# Altium PCB ESP32-PCB-Antenna-USB-Dongle-Motion-Sensor.PcbDoc
Units mm, origin at the board's own origin, x right, y up, seen from the top; angles counter-clockwise.
Board outline 32.5 x 46.2 mm, 4 copper layers (Top Layer, Mid Layer 1, Mid Layer 2, Bottom Layer), stack 1.57 mm thick; 54 components, 44 nets, 207 pads, 79 vias.
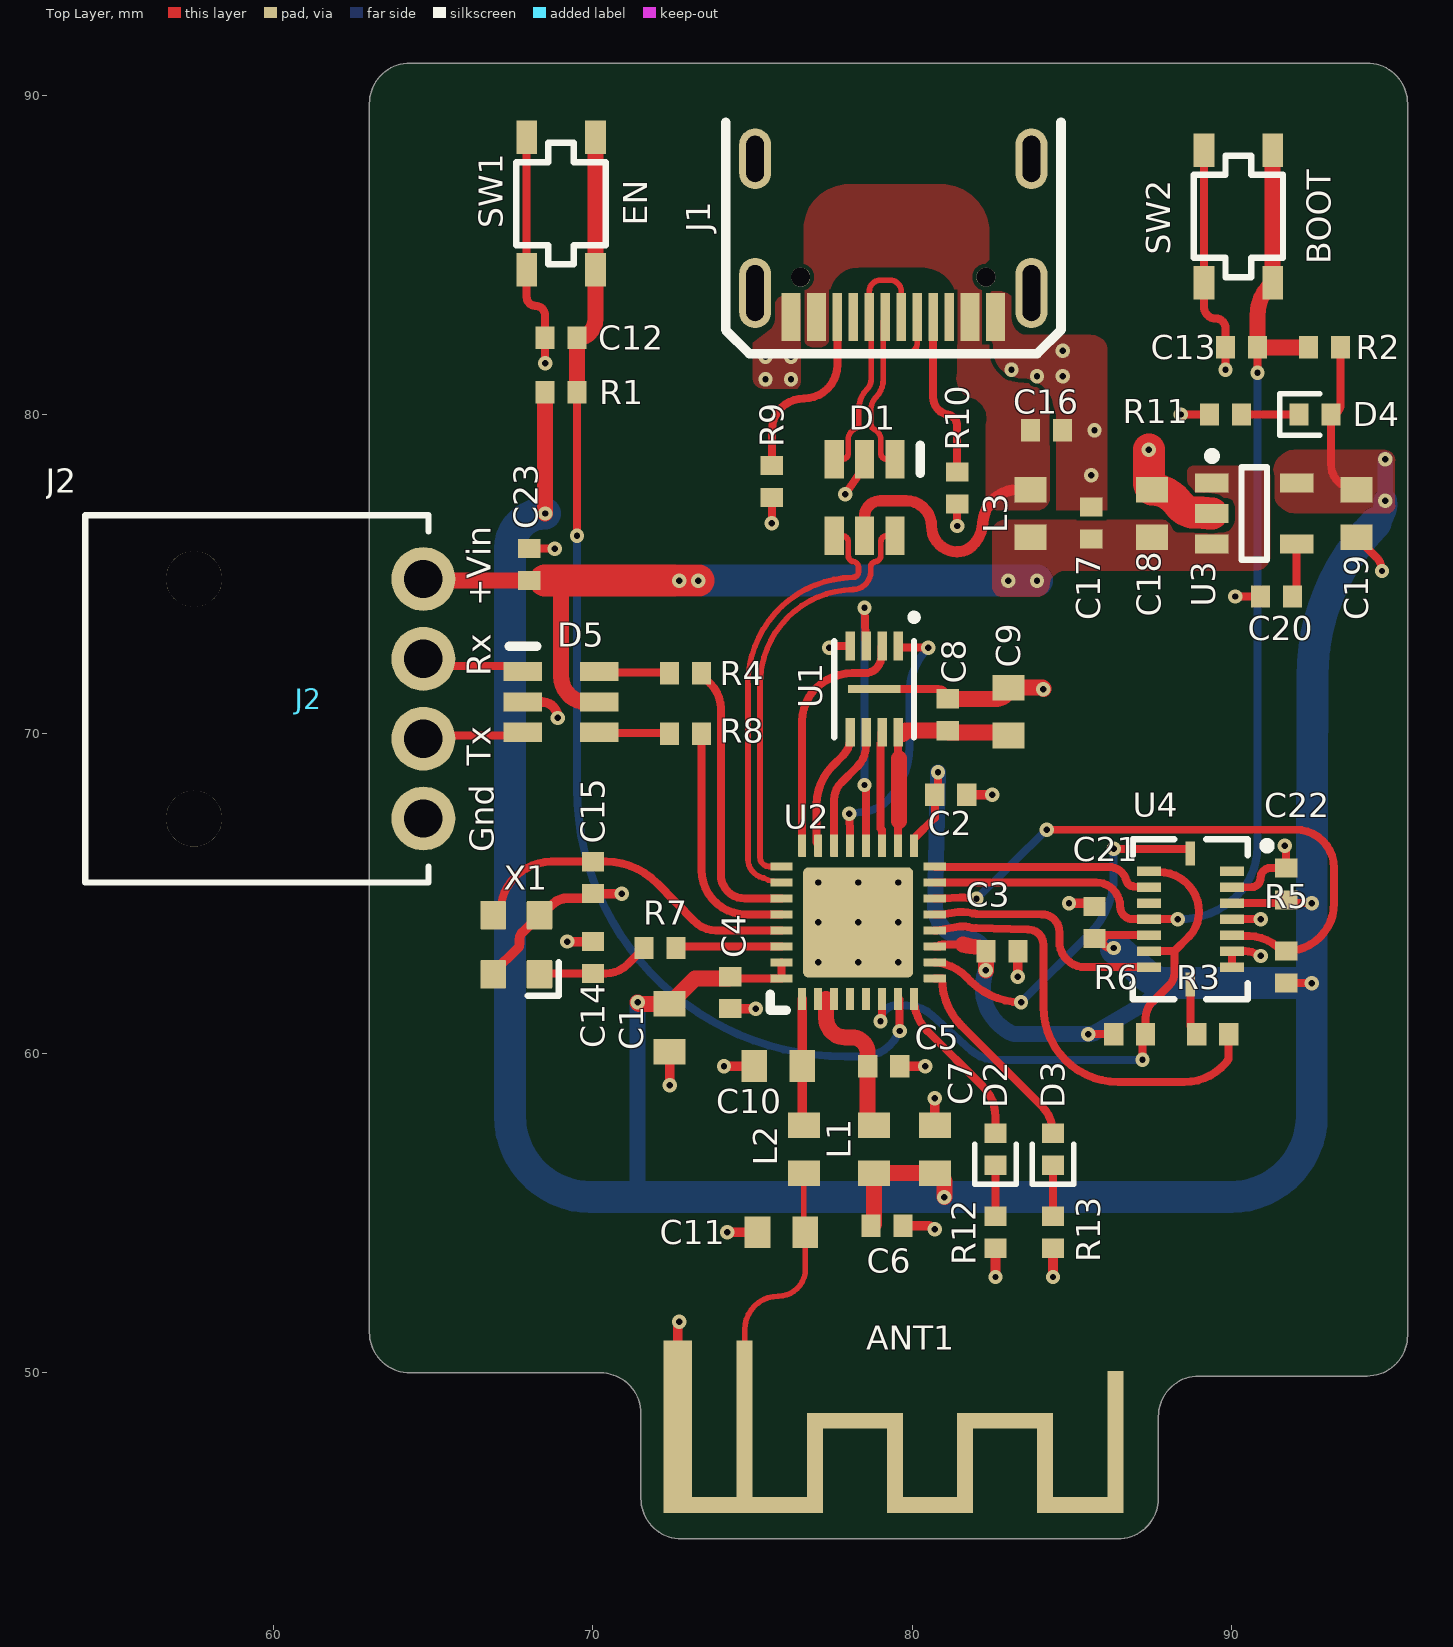
[diagram p0: Top Layer view]
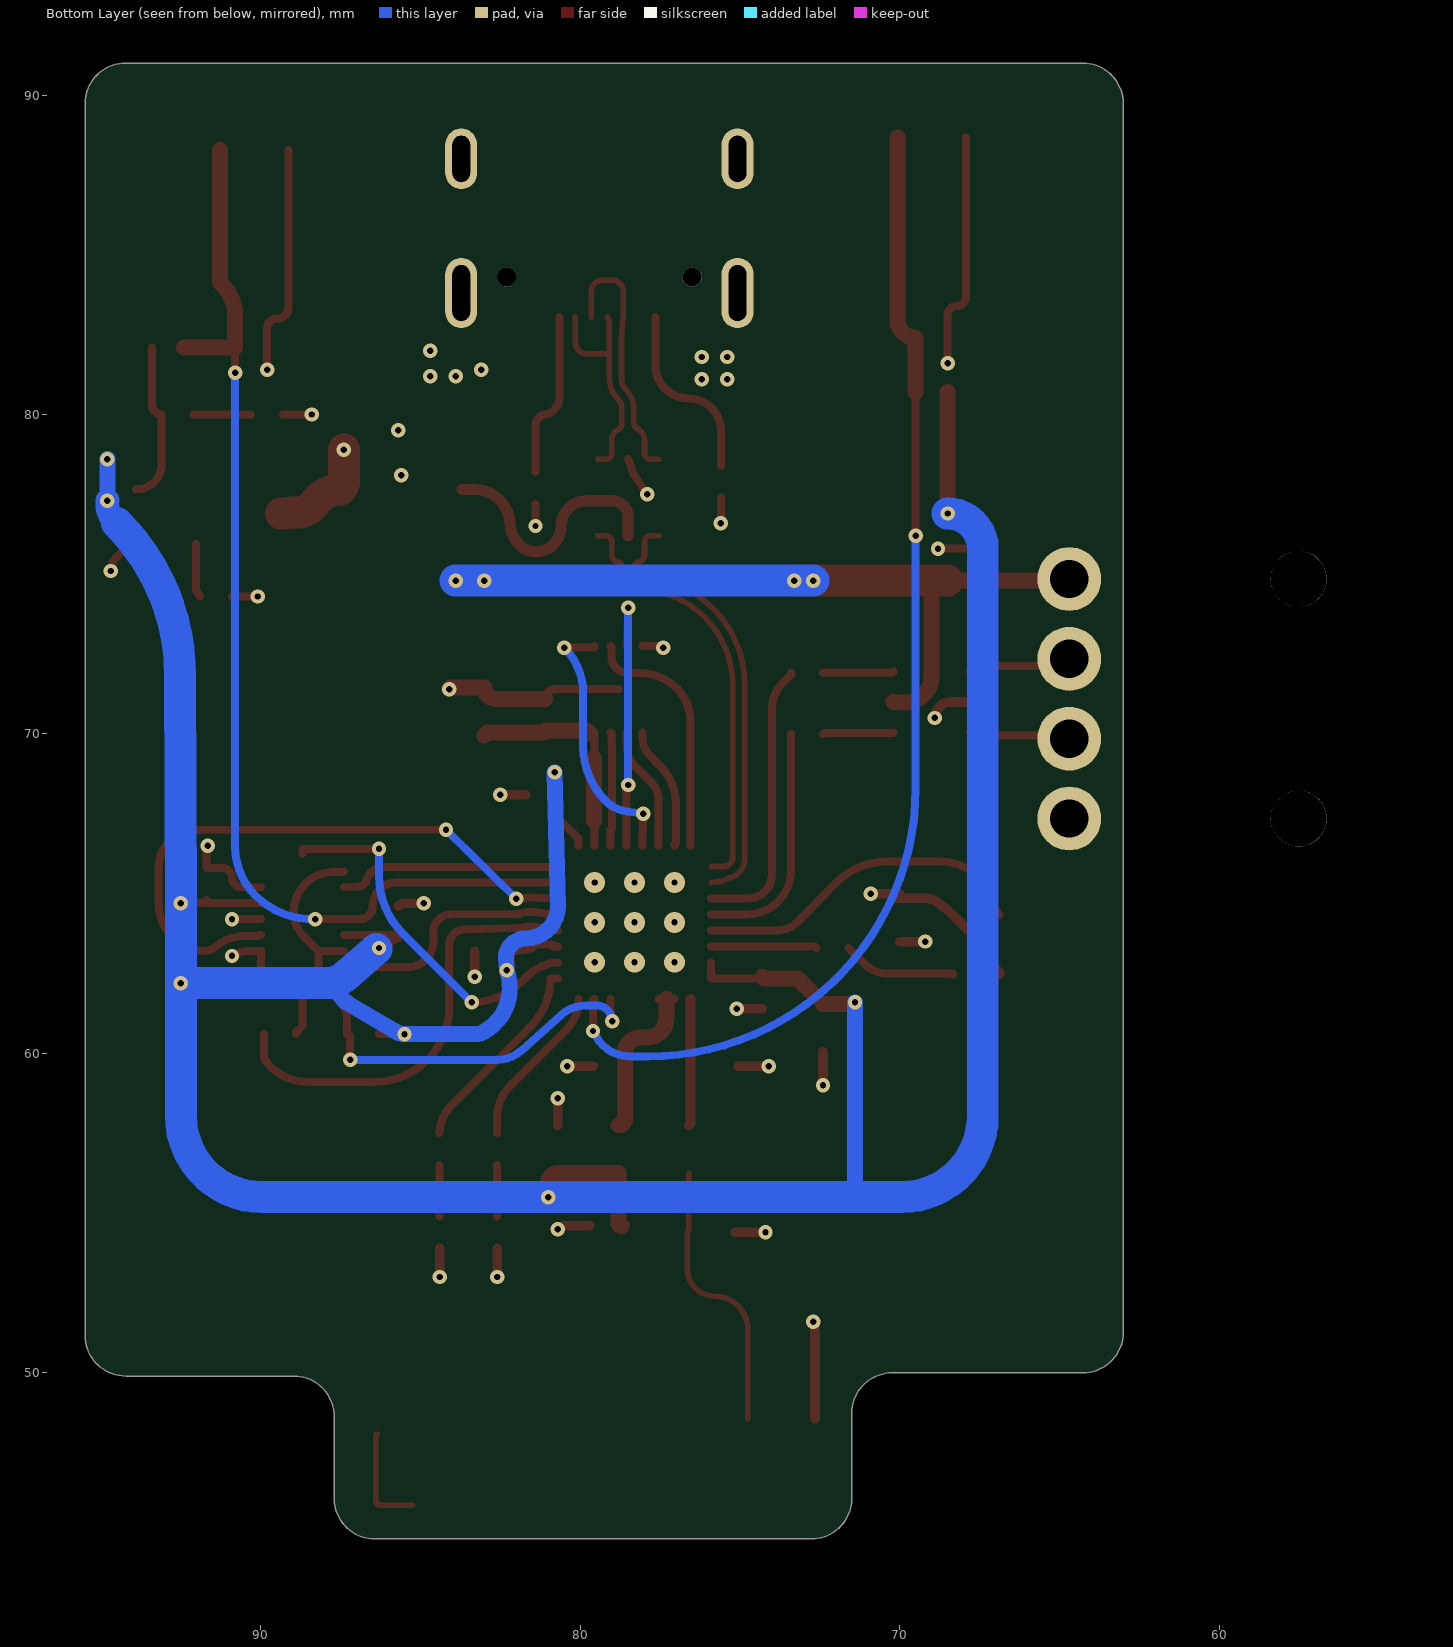
[diagram p1: Bottom Layer view, seen from below]
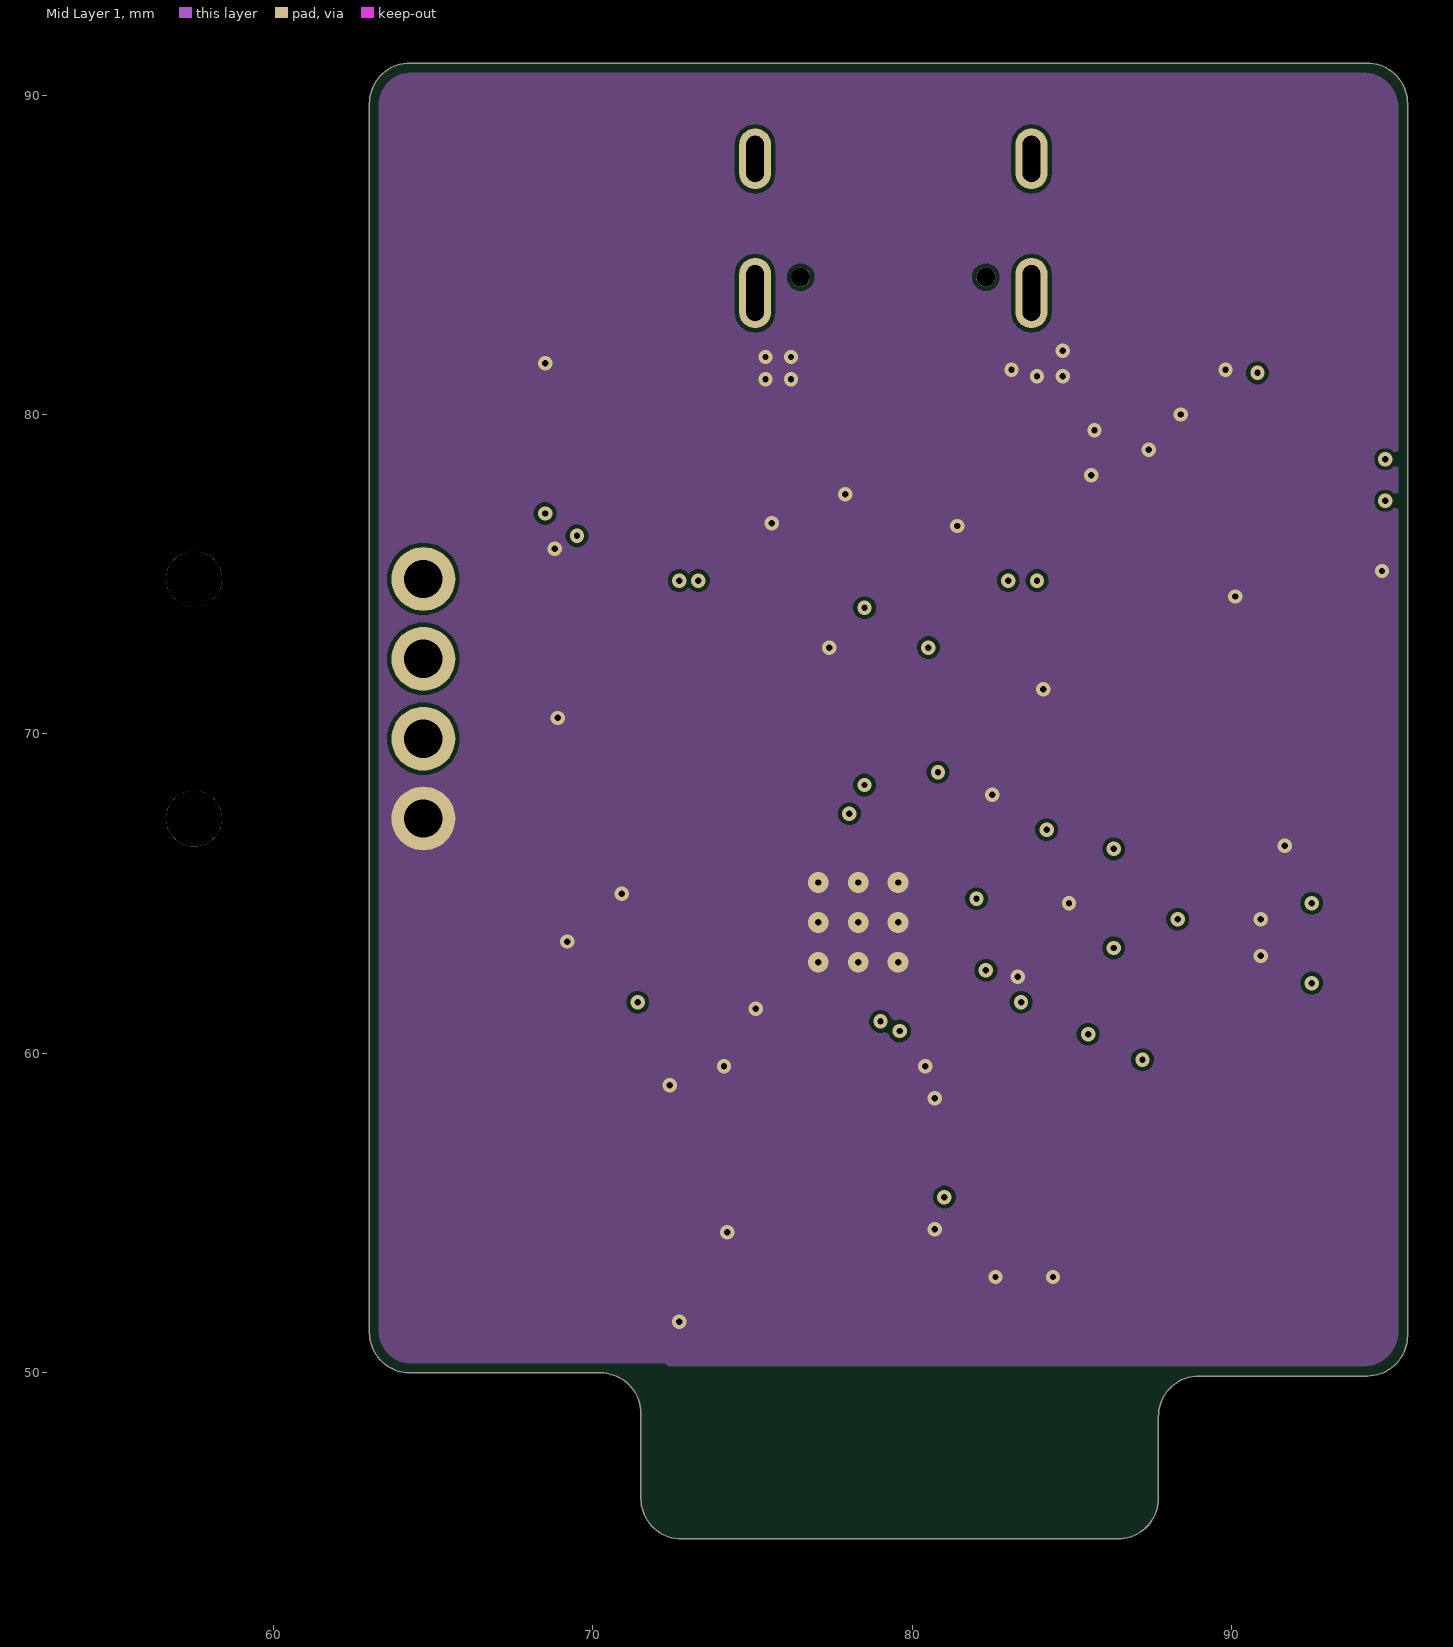
[diagram p2: Mid Layer 1]
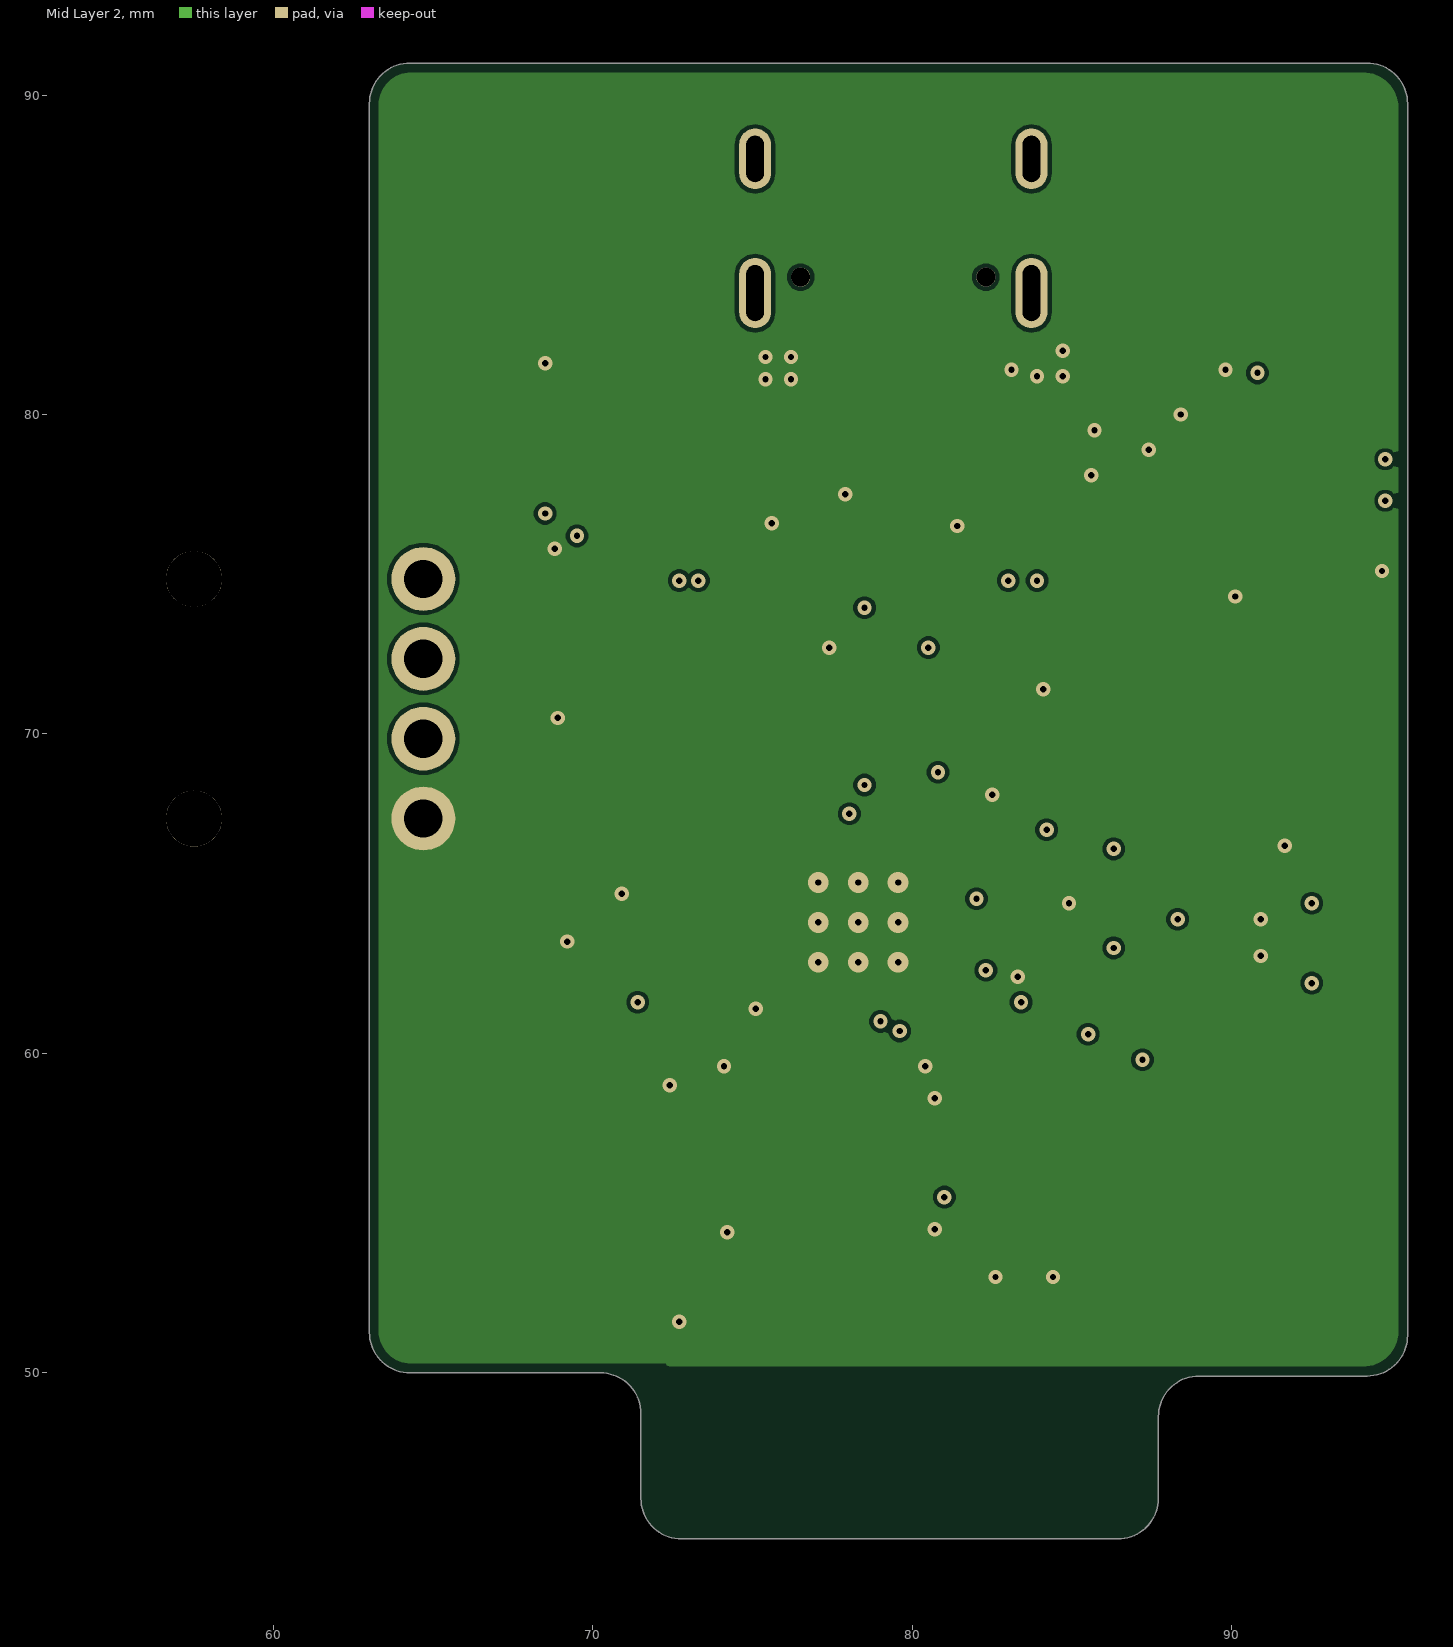
[diagram p3: Mid Layer 2]
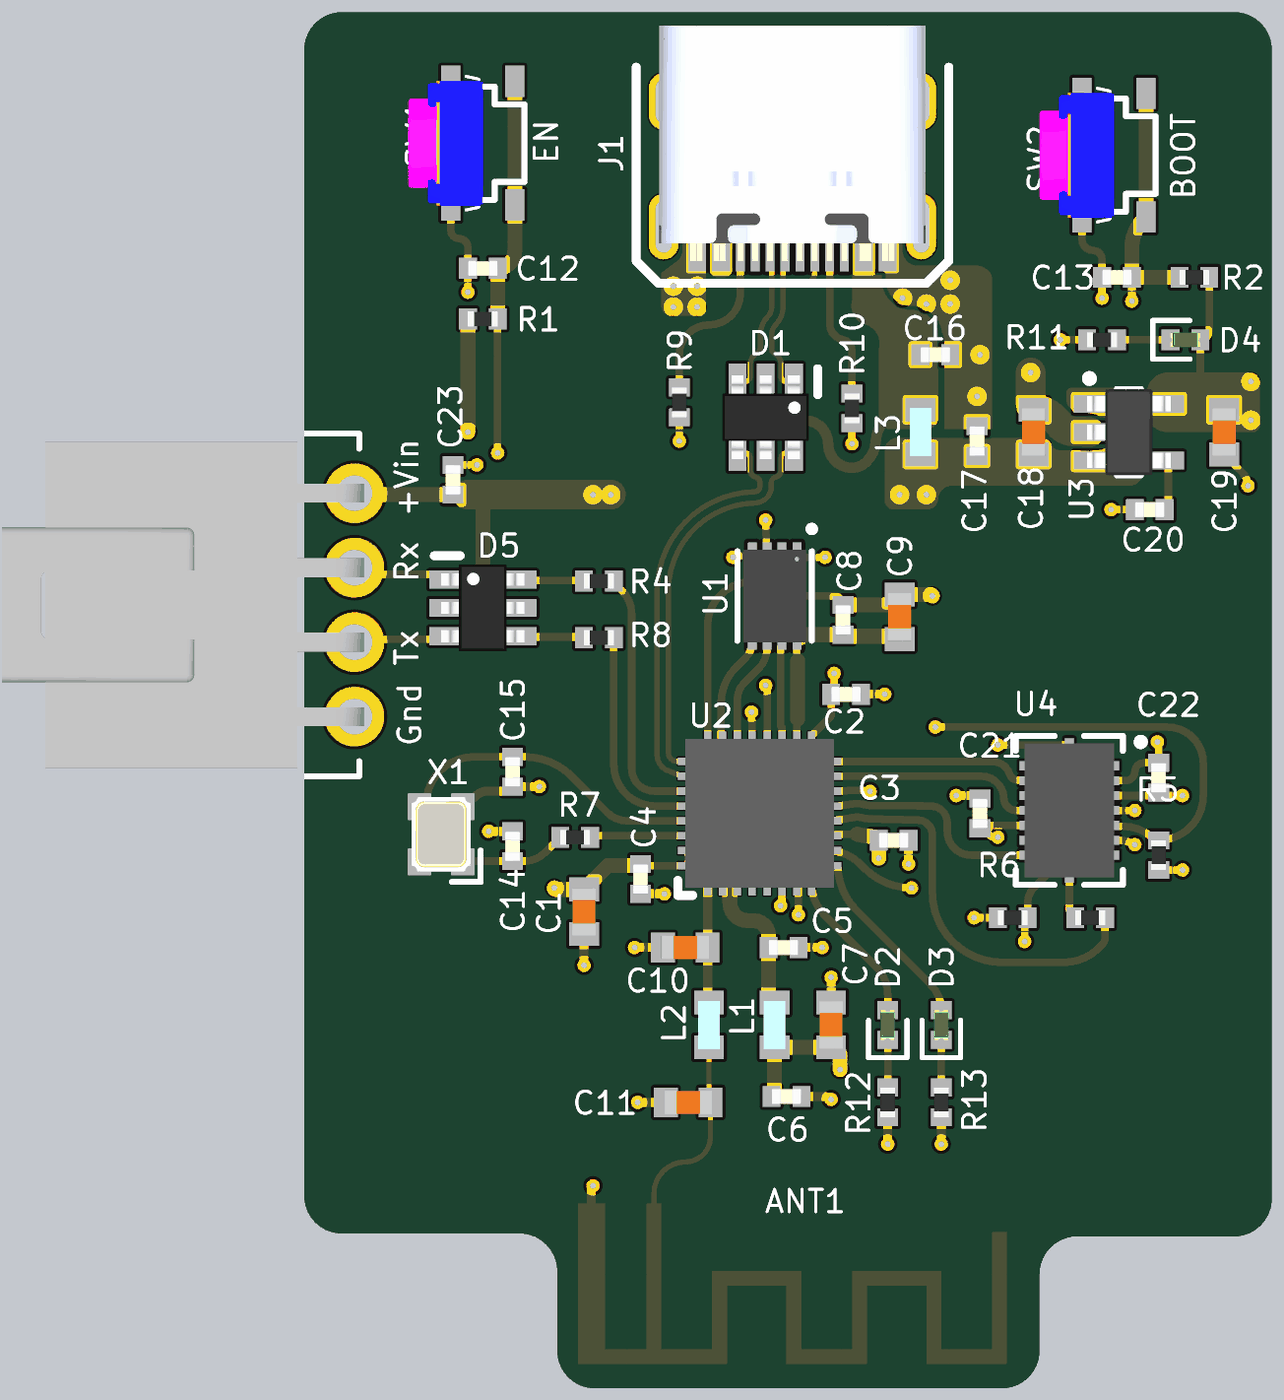
[diagram p4: 3D render of the assembled board from above, using the file's embedded part models]

## Layer stack, top to bottom
Top Solder: solder mask 0.0127, Solder Resist, Dk 3.8
Top Layer: signal copper 0.035
Dielectric 1: prepreg 0.1, 2313, Dk 4.05
Mid Layer 1: signal copper 0.0175
Core: core 1.265, FR-4, Dk 4.5
Mid Layer 2: signal copper 0.0175
Dielectric 2: prepreg 0.1, 2313, Dk 4.05
Bottom Layer: signal copper 0.035
Bottom Solder: solder mask 0.0127, Solder Resist, Dk 3.8

## Board outline
70.23,50 cw(c70.23,48.73) 71.5,48.73 71.5,46.07 ccw(c72.77,46.07) 72.77,44.8 86.43,44.8 ccw(c86.43,46.07) 87.7,46.07 87.7,48.63 cw(c88.97,48.63) 88.97,49.9 94.23,49.9 ccw(c94.23,51.17) 95.5,51.17 95.5,89.73 ccw(c94.23,89.73) 94.23,91 64.27,91 ccw(c64.27,89.73) 63,89.73 63,51.27 ccw(c64.27,51.27) 64.27,50

## Design rules (kind name [scope] priority, off if disabled: settings)
Clearance [All] p1: gap=0.125 ignorepadtopadclearanceinfootprint=TRUE except(0.2: Arc-Arc Arc-Track Track-Track Via-Via Text-Hole)
DiffPairsRouting [All] p1: maxlimit=0.254 minlimit=0.203 mostfreqgap=0.254 toplayer_maxgap=0.203 toplayer_prefgap=0.203 toplayer_minwidth=0.175 toplayer_maxwidth=0.175 toplayer_prefwidth=0.175 bottomlayer_maxgap=0.203 bottomlayer_prefgap=0.203 bottomlayer_minwidth=0.175 bottomlayer_maxwidth=0.175 bottomlayer_prefwidth=0.175 impedanceprofiledriven=TRUE impedanceprofileid={7D1431A9-B56C-4724-BADE-AF38A8293B0F} impedanceprofilevalue=90.000000 maxuncoupledlength=12.7
PolygonConnect [All] p1: connectstyle=Direct reliefconductorwidth=0.254 reliefentries=4 polygonreliefangle="90 Angle" airgapwidth=0.254
RoutingVias [All] p1: holewidth=0.2 width=0.45 viastyle="Through Hole" minholewidth=0.2 minwidth=0.45 maxholewidth=0.4 maxwidth=0.9
SolderMaskExpansion [All] p1: expansion=0.102 istentingtop=FALSE
UnRoutedNet [All] p1: checkbadconnections=TRUE
Width [All] p1: maxlimit=1 minlimit=0.172 preferedwidth=0.25 toplayer_prefwidth=0.172 bottomlayer_prefwidth=0.172 impedanceprofiledriven=TRUE impedanceprofileid={5AA82738-0A2E-437D-8FB6-D0ACE1C1D8C7} impedanceprofilevalue=50.000000 minimp=50.000000 maximp=50.000000 favimp=50.000000
28 further rules are at their usual default settings.

## Classes and differential pairs
differential pair USB_D: +USB_D_P -USB_D_N
differential pair MCU_USB_D: +MCU_USB_D_P -MCU_USB_D_N

## Components (designator, comment, footprint, x,y, rotation, side; value= is the part's Value field where it differs from the comment)
ANT1 "PCB Antenna 2.4GHz 50Ohm" ANT_IFA_USB_2_4GHZ_50R 72.65,51.01 r0 top
C1 "10u,0603" CAP_0603 72.4,60.8 r90 top
C2 "100n,0402" CAP_0402 81.2,68.1 r180 top
C3 "100n,0402" CAP_0402 82.8,63.2 r180 top
C4 "100n,0402" CAP_0402 74.3,61.9 r90 top
C5 "100n,0402" CAP_0402 79.1,59.6 r180 top
C6 "100n,0402" CAP_0402 79.2,54.6 r180 top
C7 "10u,0603" CAP_0603 80.7,57 r270 top
C8 "100n,0402" CAP_0402 81.1,70.6 r270 top
C9 "10u,0603" CAP_0603 83,70.7 r270 top
C10 "3P3,0603" CAP_0603 75.8,59.6 r180 top
C11 "3P3,0603" CAP_0603 75.9,54.4 r180 top
C12 "100n,0402" CAP_0402 69,82.4 r0 top
C13 "100n,0402" CAP_0402 90.3,82.1 r0 top
C14 "10p,0402" CAP_0402 70,63 r270 top
C15 "10p,0402" CAP_0402 70,65.5 r90 top
C16 "100n,0402" CAP_0402 84.2,79.5 r180 top
C17 "100n,0402" CAP_0402 85.6,76.6 r270 top
C18 "10u,0603" CAP_0603 87.5,76.9 r270 top
C19 "10u,0603" CAP_0603 93.9,76.9 r90 top
C20 "100n,0402" CAP_0402 91.4,74.3 r0 top
C21 "100n,0402" CAP_0402 85.7,64.1 r270 top
C22 "100n,0402" CAP_0402 91.7,65.3 r270 top
C23 "100n,0402" CAP_0402 68,75.3 r270 top
D1 "USBLC6-2SC6" SOT-23-6 78.5,77.4 r180 top
D2 "GREEN" LED_0402_GREEN 82.6,57 r270 top
D3 "GREEN" LED_0402_GREEN 84.4,57 r270 top
D4 "GREEN" LED_0402_GREEN 92.6,80 r180 top
D5 "USBLC6-2SC6" SOT-23-6 69,71 r270 top
J1 "TYPE-C-31-M-12" TYPE-C-31-M-12 79.4,85.9 r180 top
J2 "105313-1104" 105313-1104 61.1,71.1 r270 top
L1 "2n2,0603" IND_0603 78.8,57 r270 top
L2 "2n2,0603" IND_0603 76.6,57 r270 top
L3 "2n2,0603" IND_0603 83.7,76.9 r270 top
R1 "5k1,0402" RES_0402 69,80.7 r180 top
R2 "5k1,0402" RES_0402 92.9,82.1 r0 top
R3 "22R,0402" RES_0402 89.4,60.6 r0 top
R4 "470R,0402" RES_0402 72.9,71.9 r0 top
R5 "5k1,0402" RES_0402 91.7,62.7 r270 top
R6 "5k1,0402" RES_0402 86.8,60.6 r180 top
R7 "22R,0402" RES_0402 72.1,63.3 r180 top
R8 "470R,0402" RES_0402 72.9,70 r0 top
R9 "5k1,0402" RES_0402 75.6,77.9 r90 top
R10 "5k1,0402" RES_0402 81.4,77.7 r90 top
R11 "1k,0402" RES_0402 89.8,80 r0 top
R12 "1k,0402" RES_0402 82.6,54.4 r90 top
R13 "1k,0402" RES_0402 84.4,54.4 r90 top
SW1 "SKRPANE010" SKRPANE010 69,86.6 r90 top
SW2 "SKRPANE010" SKRPANE010 90.2,86.2 r90 top
U1 "W25Q16JVUXIQ" USON-8-2X3MM 78.8,71.4 r270 top
U2 "ESP32-C3" QFN32-5x5 78.3,64.1 r90 top
U3 "SPX3819M5-L-3-3/TR" SOT-23-5 90.7,76.9 r0 top
U4 "BMI055" BMI088 88.7,64.2 r270 top
X1 "40Mhz,2520" XTAL_2520 67.6,63.4 r90 top

## Footprints (in the part's own frame and the unit in brackets; to place one, negate y for a bottom-side part, rotate by r counter-clockwise, add the part's x,y. Pads: shape width x height; smd on the part's side, far side on the other; paste and mask are expansions set on the pad)
105313-1104 [mm]
  round 2 hole 1.2: 1(3.75,3.59) 2(1.25,3.59) 3(-1.25,3.59) 4(-3.75,3.59)
  round 1.75 hole 1.75 unplated: MH(-3.75,-3.59) MH(3.75,-3.59)
  silkscreen extent -5.75,-7 5.75,3.75, body extent -5.47,-8.25 5.47,3.91, height 6.65
ANT_IFA_USB_2_4GHZ_50R [mm]
  rect 5x0.5 smd paste-2539.97 mask+0.102: 1(2.05,-5.15)
  rect 0.5x4.9 smd paste-2539.97 mask+0.102: 1(2.1,-2.45)
  rect 0.5x2.64 smd paste-2539.97 mask+0.102: 1(4.3,-3.58) 1(6.8,-3.58) 1(9,-3.58) 1(11.5,-3.58)
  rect 2x0.5 smd paste-2539.97 mask+0.102: 1(5.55,-2.51) 1(10.25,-2.51)
  rect 2.7x0.5 smd paste-2539.97 mask+0.102: 1(7.9,-5.15) 1(12.6,-5.15)
  rect 0.5x3.94 smd paste-2539.97 mask+0.102: 1(13.7,-2.93)
  rect 0.9x4.9 smd paste-2539.97 mask+0.102: 2(0,-2.45)
BMI088 [mm]
  rect 0.3x0.75 smd: 1(-1.5,1.3) 2(-1,1.3) 3(-0.5,1.3) 4(0,1.3) 5(0.5,1.3) 6(1,1.3) 7(1.5,1.3) 9(1.5,-1.3) 10(1,-1.3) 11(0.5,-1.3) 12(0,-1.3) 13(-0.5,-1.3) 14(-1,-1.3) 15(-1.5,-1.3)
  rect 0.75x0.3 smd: 8(2.05,0) 16(-2.05,0)
  silkscreen extent -2.5,-1.8 2.5,2.51, body extent -2.25,-1.5 2.25,1.5, height 1.01
CAP_0402 [mm]
  rect 0.6x0.7 smd: 1(-0.5,0) 2(0.5,0)
  body extent -0.5,-0.26 0.5,0.26, height 0.37
CAP_0603 [mm]
  rect 0.8x1 smd: 1(-0.75,0) 2(0.75,0)
  body extent -0.8,-0.4 0.8,0.4, height 0.51
IND_0603 [mm]
  rect 0.8x1 smd: 1(-0.75,0) 2(0.75,0)
  body extent -0.81,-0.37 0.81,0.37, height 0.87
LED_0402_GREEN [mm]
  rect 0.6x0.7 smd: A(-0.5,0) K(0.5,0)
  silkscreen extent -0.15,-0.65 1.1,0.65, body extent -0.51,-0.25 0.51,0.25, height 0.45
QFN32-5x5 [mm]
  rrect10% 0.7x0.25 smd mask+0.05: 1(-2.4,1.75) 2(-2.4,1.25) 3(-2.4,0.75) 4(-2.4,0.25) 5(-2.4,-0.25) 6(-2.4,-0.75) 7(-2.4,-1.25) 8(-2.4,-1.75) 17(2.4,-1.75) 18(2.4,-1.25) 19(2.4,-0.75) 20(2.4,-0.25) 21(2.4,0.25) 22(2.4,0.75) 23(2.4,1.25) 24(2.4,1.75)
  rrect10% 0.25x0.7 smd mask+0.05: 9(-1.75,-2.4) 10(-1.25,-2.4) 11(-0.75,-2.4) 12(-0.25,-2.4) 13(0.25,-2.4) 14(0.75,-2.4) 15(1.25,-2.4) 16(1.75,-2.4) 25(1.75,2.4) 26(1.25,2.4) 27(0.75,2.4) 28(0.25,2.4) 29(-0.25,2.4) 30(-0.75,2.4) 31(-1.25,2.4) 32(-1.75,2.4)
  rrect10% 3.45x3.45 smd mask+0.07: 33(0,0)
  silkscreen extent -2.75,2.25 -2.25,2.75, body extent -2.5,-2.5 2.5,2.5, height 0.85
RES_0402 [mm]
  rect 0.6x0.7 smd: 1(-0.5,0) 2(0.5,0)
  body extent -0.5,-0.25 0.5,0.25, height 0.3
SKRPANE010 [mm]
  rect 1.05x0.65 smd: 12(-2.075,1.075) 12(2.075,1.075) 34(-2.075,-1.075) 34(2.075,-1.075)
  silkscreen extent -1.9,-1.4 1.9,1.4, body extent -2.3,-1.6 2.3,1.6, height 2.51
SOT-23-5 [mm] "SOT23, 5-Leads, Body 2,90x2,80mm, Pitch 0,95mm, IPC Medium Density"
  rect 1.05x0.6 smd: 1(-1.325,0.95) 2(-1.325,0) 3(-1.325,-0.95) 4(1.325,-0.95) 5(1.325,0.95)
  silkscreen extent -1.45,-1.45 0.4,1.92, body extent -1.4,-1.45 1.4,1.45, height 1.45
SOT-23-6 [mm]
  rect 0.6x1.2 smd: 1(-0.95,-1.2) 2(0,-1.2) 3(0.95,-1.2) 4(0.95,1.2) 5(0,1.2) 6(-0.95,1.2)
  silkscreen extent -1.75,-1.63 -1.75,-0.76, body extent -1.45,-1.4 1.45,1.4, height 1.45
TYPE-C-31-M-12 [mm]
  rect 0.6x1.5 smd mask+0.07: A1B12(-3.2,2.85) B1A12(3.2,2.85)
  rect 0.6x1.5 smd mask+0.14: A4B9(-2.4,2.85) B4A9(2.4,2.85)
  rect 0.3x1.5 smd mask+0.14: A5(-1.25,2.85) A6(-0.25,2.85) A7(0.25,2.85) A8(1.25,2.85) B5(1.75,2.85) B6(0.75,2.85) B7(-0.75,2.85) B8(-1.75,2.85)
  round 0.6 hole 0.6 unplated mask+0.3: MH(-2.9,1.6) MH(2.9,1.6)
  oval 1x1.9 hole 0.55 slot 1.45 at 90 deg mask+0.05: SH(-4.325,-2.1) SH(4.325,-2.1)
  oval 1x2.2 hole 0.55 slot 1.75 at 90 deg mask+0.05: SH(-4.325,2.1) SH(4.325,2.1)
  silkscreen extent -5.25,-3.25 5.25,4, body extent -4.47,-4.65 4.47,3.25, height 3.32
USON-8-2X3MM [mm]
  rect 0.9x0.3 smd mask+0.13: 1(-1.35,0.75) 2(-1.35,0.25) 3(-1.35,-0.25) 4(-1.35,-0.75) 5(1.35,-0.75) 6(1.35,-0.25) 7(1.35,0.25) 8(1.35,0.75)
  rect 0.25x1.65 smd paste-0.1: 9(0,0)
  silkscreen extent -2.35,-1.25 1.5,1.35, body extent -1.55,-1.05 1.55,1.05, height 0.61
XTAL_2520 [mm]
  rrect10% 0.9x0.8 smd mask+0: 1(-0.925,-0.725) 2(0.925,-0.725) 3(0.925,0.725) 4(-0.925,0.725)
  silkscreen extent -1.6,-1.33 -0.54,-0.36, body extent -1.25,-1 1.25,1, height 0.8

## Part data
ANT1: library part ANT_IFA_USB_2_4GHZ_50R, "Inverted F 2.4GHz ISM PCB Antenna 50 Ohm", ComponentLink1Description=Datasheet, ComponentLink1URL=https://www.ti.com/lit/an/swra117d/swra117d.pdf
C1 C7 C9 C10 C11 C18 C19: library part CAP_0603_25V, "Capacitor SMD 0603 25V"
C2 C3 C4 C5 C6 C8 C12 C13 C14 C15 C16 C17 C20 C21 C22 C23: library part CAP_0402_16V, "Capacitor SMD 0402 16V"
D1 D5: "Low-Capacitance ESD Protection USB", Manufacturer=STMicroelectronics, Distributor Link=https://www.mouser.de/ProductDetail/STMicroelectronics/USBLC6-2SC6?qs=po45yt2pPpu%2FhNIlwQdTlg%3D%3D, Manufacturer Part Number=USBLC6-2SC6
D2 D3 D4: library part LED_0402_GREEN, "LED 0402 GREEN SMD"
J1: "USB Type C Connector Horizontal SMT", Manufacturer="Koren Hroparts", Manufacturer Part Number=TYPE-C-31-M-12
J2: "Nano-Fit Right-Angle Header, Through Hole, 2.50mm Pitch, Single Row, 2 Circuits, Tin (Sn) Plating, Black, Glow-Wire Capable, Tray", Manufacturer=Molex, Manufacturer Part Number=105313-1104
L1 L2 L3: library part IND_0603, "Inductor SMD 0603"
R1 R2 R3 R4 R5 R6 R7 R8 R9 R10 R11 R12 R13: library part RES_0402, "Resistor SMD 0402"
SW1 SW2: "Tactile Switch SMD SPST", Manufacturer="Alps Alpine", Manufacturer Part Number=SKRPANE010
U1: "16M-BIT SERIAL FLASH MEMORY WITH DUAL/QUAD SPI USON-8", LCSC=C2843335, Manufacturer=Winbond, Manufacturer Part Number=W25Q16JVUXIQ
U2: "Ultra­Low­Power SoC with RISC­V Single­Core CPU Supporting IEEE 802.11b/g/n (2.4 GHz Wi­Fi) and Bluetooth® 5 (LE)", LCSC=C2838500, Manufacturer=Espressif, Manufacturer Part Number=ESP32-C3
U3: "500mA +3.3V Low-Noise LDO Voltage Regulator", Manufacturer=MaxLinear, Manufacturer Part Number=SPX3819M5-L-3-3/TR
U4: "Inertial Measurement Unit IMU 6-Axis LGA", LCSC=C189620, Manufacturer=Bosch, Manufacturer Part Number=BMI055
X1: library part XTAL_2520, "Crystal SMD 2520"

## Via types
v1: diameter 0.45, hole 0.2, Top Layer to Bottom Layer, 70 vias
v2: diameter 0.65, hole 0.2, Top Layer to Bottom Layer, tented both sides, 9 vias

## Nets (pads, with @x,y where several pads share a name; then routed paths per layer and width w, separated by ;. In a path a pad name is that pad's centre, name@x,y a point inside that pad or via, vN(x,y) a via of type N, cw(c..) or ccw(c..) an arc to the next point about the centre after c; other vN are vias at no path point)
+3V3: C1.2 C2.2 C3.2 C4.2 C6.2 C7.2 C19.2 C21.2 C22.2 D4.A L1.2 R1.2 R2.2 R5.2 R6.2 U2.11 U2.17 U2.31 U2.32 U3.5 U4.3 U4.11 | length 126.3
  Top Layer w0.25: C4.2@74.287,62.387 C4.2 ; C4.2@74.35,62.4 74.4,62.35 U2.32 U2.31 ; U2.17 80.05,66.725 80.7,67.375 C2.2 80.8,68.325 v1(80.8,68.8) ; U2.11 80.845,63.35 80.845,63.389 cw(c81.015,62.71) 81.022,63.41 81.578,63.404 ; v1(85.5,60.6) R6.2 ; C21.2@86,63.6 85.8,63.6 C21.2 ; v1(86.3,63.3) 86.188,63.3 cw(c86.19,63.55) 85.968,63.435 ccw(c85.7,63.3) 85.925,63.498 C21.2 ; U4.11 86,63.7 85.8,63.7 ccw(c85.8,63.6) C21.2 ; U4.3 91.6,64.7 ccw(c91.6,64.8) C22.2 ccw(c91.8,64.8) 91.8,64.7 v1(92.5,64.7) ; R5.2 v1(92.5,62.2) ; R2.2 93.4,80.3 cw(c93.1,80.3) D4.A 93.1,78.45 ccw(c93.9,78.45) C19.2
  Top Layer w0.5: v1(68.5,76.9) R1.2 ; v1(71.4,61.6) ccw(c71.45,61.6) 71.45,61.55 C1.2 ; C1.2@72.65,61.8 73.2,62.35 74.25,62.35 C4.2@74.287,62.387 ; C6.2 ccw(c78.7,54.7) 78.8,54.7 L1.2 C7.2 cw(c80.7,55.95) 81,55.95 v1(81,55.5) ; 81.578,63.404 ccw(c81.872,64.386) 81.592,63.4 ccw(c82.005,64.842) 81.82,63.353 82.25,63.3 C3.2 82.3,63.1 v1(82.3,62.6)
  Bottom Layer w0.5: v1(71.4,61.6) 71.4,55.6 ccw(c71.5,55.6) 71.5,55.5 ; v1(80.8,68.8) 80.7,64.61 80.7,64.608 ccw(c81.2,64.595) 80.7,64.592 80.7,64.59 ccw(c81.7,64.6) 81.7,63.6 cw(c81.7,62.967) 82.281,63.219 cw(c81.822,63.02) 82.321,62.992 v1(82.3,62.6) ; v1@82.292,62.578 ccw(c83.784,62.057) 83.054,60.655 ccw(c83.282,61.1) 83.28,60.6 v1(85.5,60.6) ccw(c85.498,61.1) 85.753,60.669 87.307,61.586 ccw(c87.053,62.018) 87.54,61.904 ccw(c87.054,62.02) 87.55,61.961 87.582,62.227 87.587,62.27 ; v1(94.8,77.3) v1(94.8,78.6)
  Bottom Layer w0.75: 94.5,76.6 ccw(c94.056,77.205) v1(94.8,77.3)
  Bottom Layer w1: v1(68.5,76.9) ccw(c68.5,75.8) 67.4,75.8 67.4,58.04 ccw(c69.94,58.04) 69.94,55.5 71.5,55.5 v1(81,55.5) 89.96,55.5 ccw(c89.96,58.04) 92.5,58.04 v1(92.5,62.2) v1(92.5,64.7) 92.524,71.8 ccw(c91.524,71.805) 92.524,71.805 92.524,71.808 cw(c99.287,71.823) 94.5,76.6 ; v1@86.378,63.271 87.338,62.432 ccw(c88,63.181) 87.807,62.2 87.809,62.2 v1(92.5,62.2)
+3V3_RF: C5.2 L1.1 U2.2 U2.3 | length 5.4
  Top Layer w0.25: U2.2 77.3,61.7 U2.3
  Top Layer w0.5: 77.3,61.7 77.3,61.1 ccw(c77.9,61.1) 77.9,60.5 78.1,60.5 cw(c78.1,60) 78.6,60 C5.2 78.6,57.95 ccw(c78.8,57.95) L1.1
+VBUS: C16.2 D1.5 J1.A4B9 J1.B4A9 L3.1 | length 8.1
  Top Layer w0.35: D1.5 78.5,76.8 cw(c79,76.8) 79,77.3 79.798,77.3 cw(c79.798,76.498) 80.6,76.498 ccw(c81.382,76.494) 80.827,75.944 ccw(c81.41,76.519) 81.396,75.7 ccw(c81.399,76.387) 81.857,75.875 81.861,75.879 ccw(c81.628,76.14) 81.864,75.881 ; 81.864,75.882 ccw(c81.165,76.646) 82.2,76.601 cw(c83.306,76.543) 83.306,77.65 L3.1
+VBUS_FLT: C17.2 C18.2 C23.2 D5.5 J2.4 L3.2 U3.1 U3.3 | length 24.3
  Top Layer w0.5: J2.4 ccw(c64.908,75.3) 64.906,74.8 C23.2 C23.2@68.3,74.8 ; 68.9,74.8 69,74.7 69,72.1 69,72.098 69,71.815 ccw(c69.839,71.818) 69.933,70.984 cw(c69.987,70.487) D5.5@69.957,70.986 ; D5.5@69.959,70.986 D5.5
  Top Layer w1: 68.5,74.8 68.9,74.8 v1(72.7,74.8) v1(73.3,74.8)
  Bottom Layer w1: v1(72.7,74.8) v1(73.3,74.8) v1(83,74.8) v1(83.9,74.8)
+VCC_SPI: C8.2 C9.2 U1.8 U2.18 | length 7
  Top Layer w0.25: U2.18 79.55,67.25 79.575,67.275 ; U1.8 79.55,69.25 79.575,69.225
  Top Layer w0.5: 79.575,67.275 79.575,69.225 ; 79.7,70 79.8,70.1 C8.2 81.15,70.05 82.9,70.05 C9.2
ANT_RF: ANT1.1 C11.1 L2.2 | length 12.1
  Top Layer w0.172: ANT1.1@74.75,48.56 74.75,51.35 cw(c75.8,51.35) 75.8,52.4 ccw(c75.8,53.25) 76.65,53.25 C11.1 76.6,54.45 L2.2 ; ANT1.1@85.25,45.86 86.26,45.86 ccw(c86.26,46) 86.4,46 86.4,48.03 ccw(c86.35,48.03) ANT1.1@86.35,48.08
CC1: J1.A5 R10.2 | length 5.2
  Top Layer w0.25: 80.65,80.535 ccw(c81.192,80.534) 81.099,80 cw(c81.042,79.646) 81.4,79.646 R10.2 ; 80.65,80.537 J1.A5
CC2: J1.B5 R9.2 | length 5.8
  Top Layer w0.25: R9.2 75.6,79.5 cw(c76.6,79.5) 76.6,80.5 ccw(c76.6,81.55) 77.65,81.55 J1.B5
CHIP_EN: C12.2 R1.1 SW1.34 U2.7 | length 37
  Top Layer w0.25: v1(69.5,76.2) R1.1 ; U2.7 cw(c79.55,61.65) 79.6,61.65 v1(79.6,60.7)
  Top Layer w0.5: R1.1 C12.2 ccw(c69.5,82.975) 70.075,82.975 70.075,84.525 SW1.34@70.075,88.675
  Bottom Layer w0.25: v1(69.5,76.2) 69.5,68.3 ccw(c77.9,68.3) 77.9,59.9 78.429,59.9 ccw(c78.429,61.138) 79.516,60.546 v1(79.6,60.7)
FSPI_CLK: R3.1 U4.8 | length 1.6
  Top Layer w0.25: U4.8 88.7,60.85 88.9,60.65 R3.1
FSPI_D: U2.13 U4.9 | length 7.8
  Top Layer w0.25: U2.13 80.925,64.35 81.44,64.42 cw(c81.578,63.404) 81.872,64.386 ; 81.873,64.386 ccw(c82.005,64.842) 82,64.367 84.048,64.35 ; 84.048,64.35 84.05,64.35 cw(c84.05,63.8) 84.483,64.139 cw(c84.05,63.8) 84.6,63.8 84.6,63.5 ccw(c85.4,63.5) 85.4,62.7 U4.9
FSPI_NCS: U2.16 U4.14 | length 7
  Top Layer w0.25: U2.16@80.71,65.84 86.128,65.84 cw(c86.128,65.249) 86.698,65.408 ccw(c86.938,65.476) 86.923,65.227 ; 86.924,65.227 U4.14
FSPI_NCS2: R5.1 U2.14 U4.5 | length 19.3
  Top Layer w0.25: U2.14 80.925,64.85 81.509,64.877 cw(c81.578,63.404) 81.734,64.871 v1(82.005,64.842) ; v1(84.2,67) 91.996,67 cw(c91.996,65.796) 93.2,65.796 93.2,64.7 cw(c91.7,64.7) R5.1 R5.1@91.475,63.292 ; U4.5 90.099,63.675 90.099,63.668 ccw(c90.124,63.917) 90.123,63.667 90.53,63.667 cw(c90.53,62.292) 91.453,63.31 ccw(c91.742,63.626) R5.1@91.474,63.292
  Bottom Layer w0.25: v1(82.005,64.842) v1(84.2,67)
FSPI_Q: R6.1 U2.6 U4.10 U4.15 | length 18.2
  Top Layer w0.25: v1(79,61) ccw(c79,61.05) 79.05,61.05 U2.6 ; v1(87.2,59.8) 87.2,60.5 cw(c87.3,60.5) R6.1 87.3,60.825 87.3,61.099 cw(c88.032,61.097) 87.512,61.612 88.058,62.158 ; U4.10 88.2,63.2 ; U4.15 87.425,65.675 87.718,65.675 cw(c87.721,64.425) 88.971,64.43 cw(c87.864,64.43) 88.651,63.651 88.2,63.2 ; 88.059,62.159 ccw(c87.717,62.5) 88.2,62.5 88.2,63.2
  Bottom Layer w0.25: v1(79,61) cw(c79.5,61) 79.5,61.5 79.817,61.5 cw(c79.818,60.331) 80.6,61.2 81.833,60.096 cw(c81.666,59.91) 81.835,60.095 ccw(c82.608,60.961) 82.623,59.8 v1(87.2,59.8)
GND: ANT1.2 C1.1 C2.1 C3.1 C4.1 C5.1 C6.1 C7.1 C8.1 C9.1 C10.2 C11.2 C12.1 C13.1 C14.1 C15.1 C16.1 C17.1 C18.1 C19.1 C20.1 C21.1 C22.1 C23.1 D1.2 D5.2 J1.A1B12 J1.B1A12 J2.1 R9.1 R10.1 R11.1 R12.1 R13.1 SW1.12 SW2.12 U1.4 U1.9 U2.33 U3.2 U4.2 U4.4 U4.6 U4.7 X1.2 X1.4 | length 57.5
  Top Layer w0.25: SW1.12@67.925,88.675 67.925,84.525 67.925,83.675 ccw(c68.2,83.675) 68.2,83.4 cw(c68.2,83.1) 68.5,83.1 C12.1 v1(68.5,81.6) ; C23.1 v1(68.8,75.8) ; v1(75.6,76.6) R9.1 ; v1(77.4,72.7) cw(c77.45,72.7) 77.45,72.75 U1.4 ; v1(77.9,77.5) 78.325,78.125 D1.2 ; U1.9 80.8,71.4 cw(c80.8,71.1) C8.1 ; v1(81.4,76.509) R10.1 ; v1(88.4,80) R11.1 ; SW2.12@89.125,88.275 89.125,84.125 89.125,83.375 ccw(c89.5,83.375) 89.5,83 cw(c89.5,82.7) 89.8,82.7 C13.1 v1(89.8,81.4) ; U4.7 U4.6 90.417,63.2 cw(c90.417,62.517) 90.9,63 v1(90.9,63.05) ; U4.4 v1(90.9,64.2) ; U4.2 90.6,65.2 ccw(c90.6,65.5) 90.9,65.5 cw(c91.2,65.5) 91.2,65.8 C22.1 91.7,66.5 v1(91.656,66.5) ; v1(90.1,74.3) C20.1 ; C19.1 94.523,75.527 cw(c94.096,75.1) v1(94.7,75.1)
  Top Layer w0.3: X1.4 66.875,62.525 67.686,63.336 ccw(c67.4,63.427) 67.7,63.426 67.7,63.576 cw(c68,63.576) 67.787,63.787 X1.2 68.575,64.551 ccw(c68.466,64.83) 68.655,64.598 68.83,64.742 cw(c69.022,64.512) 68.912,64.791 69.009,64.829 cw(c69.119,64.55) 69.118,64.85 C15.1@70.2,64.85 ; D5.2 68.4,71 cw(c68.4,70.5) v1(68.9,70.5) ; v1(69.2,63.5) C14.1 ; C15.1 v1(70.9,65) ; v1(72.4,59) C1.1 ; ANT1.2 72.65,51.479 cw(c72.821,51.479) v1(72.7,51.6) ; v1(74.1,59.6) C10.2 ; v1(74.2,54.4) C11.2 ; C4.1 v1(75.1,61.4) ; C5.1 v1(80.4,59.6) ; C6.1 80.459,54.6 cw(c80.459,54.259) v1(80.7,54.5) ; C7.1 v1(80.7,58.6) ; C2.1 v1(82.5,68.1) ; v1(82.6,53) R12.1 ; v1(83.3,62.4) C3.1 ; v1(84.4,53) R13.1 ; v1(84.9,64.7) 85.459,64.7 cw(c85.459,64.359) C21.1
  Top Layer w0.5: C8.1 82.65,71.1 ccw(c82.65,71.45) C9.1 84.05,71.45 cw(c84.05,71.4) v1(84.1,71.4)
  Top Layer w1: v1(87.4,78.9) 87.4,77.891 ccw(c87.741,77.891) C18.1 cw(c87.5,76.684) 88.183,77.367 88.304,77.246 ccw(c88.85,77.55) 88.85,76.925 89.051,76.925 cw(c89.048,75.925) 89.199,76.914 ccw(c89.375,78.047) U3.2
  other v1: 85.6,78.1 85.7,79.5 75.4,81.1 76.2,81.1 83.9,81.2 84.7,81.2 83.1,81.4 75.4,81.8 76.2,81.8 84.7,82
  other v2: 77.05,62.85 78.3,62.85 79.55,62.85 77.05,64.1 78.3,64.1 79.55,64.1 77.05,65.35 78.3,65.35 79.55,65.35
INT_ACC: U2.10 U4.16 | length 11.5
  Top Layer w0.25: U2.10 cw(c80.593,61.327) 81.675,62.404 81.824,62.255 ccw(c83.414,63.858) v1(83.4,61.6) ; v1(86.3,66.4) 88.675,66.4 88.7,66.375 U4.16
  Bottom Layer w0.25: v1(83.4,61.6) 85.556,63.756 ccw(c83.76,65.552) 86.3,65.552 v1(86.3,66.4)
INT_GYR_GPIO9: C13.2 R2.1 SW2.34 U2.15 U4.12 | length 35.6
  Top Layer w0.25: U2.15 85.751,65.35 cw(c85.751,64.601) 86.5,64.599 ccw(c86.902,64.602) 86.9,64.2 ; 86.901,64.2 87.15,64.2 U4.12 v1(88.3,64.2) ; v1(90.8,81.3) 90.8,81.5 C13.2
  Top Layer w0.5: SW2.34@91.275,84.125 SW2.34@91.275,88.275 ; SW2.34@91.276,84.124 ccw(c92.152,83.094) 90.848,83.45 ccw(c92.152,83.094) 90.8,83.092 90.8,82.2 C13.2 R2.1
  Bottom Layer w0.25: v1@88.302,64.2 ccw(c88.369,66.751) 90.149,64.923 ccw(c88.646,66.466) 90.8,66.466 v1(90.8,81.3)
LED_A: D2.A U2.8 | length 5.2
  Top Layer w0.25: U2.8 80.05,61.475 80.05,61.517 cw(c79.829,61.4) 80.074,61.447 ccw(c81.474,61.709) 80.462,60.707 82.21,58.959 cw(c81.267,58.017) 82.6,58.013 D2.A
LED_A_K: D2.K R12.2 | length 1.6
  Top Layer w0.25: R12.2 D2.K
LED_B: D3.A U2.9 | length 6.4
  Top Layer w0.25: U2.9 80.925,62.35 ccw(c83.04,62.35) 81.544,60.855 81.596,60.803 84.05,58.349 cw(c83.875,58.171) 84.053,58.346 cw(c83.195,57.5) D3.A
LED_B_K: D3.K R13.2 | length 1.6
  Top Layer w0.25: R13.2 D3.K
LNA_IN: C10.1 L2.1 U2.1 | length 4
  Top Layer w0.307: U2.1 C10.1 76.55,57.8 L2.1
MCU_MTCK: R3.2 U2.12 | length 13.8
  Top Layer w0.25: U2.12 80.727,63.85 80.732,63.85 ccw(c80.721,64.1) 80.761,63.853 81.485,63.972 cw(c81.578,63.404) 81.745,63.954 ccw(c81.872,64.386) 81.75,63.953 ccw(c82.005,64.842) 81.982,63.917 83.619,63.877 ccw(c83.625,64.127) 83.623,63.877 83.625,63.877 cw(c83.623,63.4) 84.1,63.4 84.1,61.456 ccw(c86.454,61.454) 86.455,59.1 88.501,59.1 ; 88.503,59.1 ccw(c88.505,60.808) 89.828,59.728 ccw(c89.65,59.904) 89.9,59.904 R3.2
MCU_U0_RX: R4.2 U2.27 | length 8.8
  Top Layer w0.25: R4.2 73.4,71.85 73.681,71.569 cw(c72.914,70.8) 74,70.801 cw(c73.75,70.798) 74,70.798 74,65.6 ccw(c74.75,65.6) 74.752,64.85 75.675,64.85 U2.27
MCU_U0_TX: R8.2 U2.28 | length 7.6
  Top Layer w0.25: R8.2 73.4,65.733 ccw(c74.783,65.733) 74.783,64.35 U2.28
MCU_USB_D_N: D1.6 U2.25 | length 13.4
  Top Layer w0.175: U2.25 75.517,65.85 cw(c75.517,66.138) 75.229,66.138 75.229,71.551 cw(c78.2,71.551) 78.148,74.521 ccw(c78.135,75.075) 78.658,74.891 78.68,74.953 ccw(c78.514,75.011) 78.69,75.011 78.69,75.227 cw(c78.865,75.217) 78.835,75.39 ccw(c78.8,75.6) 79.013,75.6 79.013,76.025 cw(c79.188,76.025) 79.188,76.2 D1.6
MCU_USB_D_P: D1.4 U2.26 | length 14
  Top Layer w0.175: U2.26 75.638,65.38 75.636,65.38 cw(c75.9,66.535) 75.344,65.488 ccw(c75.264,65.332) 75.304,65.503 cw(c75.439,66.076) 74.851,66.079 74.851,71.551 cw(c78.2,71.551) 78.14,74.899 ccw(c78.135,75.075) 78.311,75.074 78.311,75.217 ccw(c78.135,75.217) 78.165,75.39 cw(c78.2,75.6) 77.987,75.6 77.987,76.025 ccw(c77.812,76.025) 77.812,76.2 D1.4
MCU_XTAL_P: R7.1 U2.30 | length 3.3
  Top Layer w0.25: R7.1 72.65,63.35 U2.30
NetC20_2: C20.2 U3.4 | length 1.7
  Top Layer w0.25: C20.2 ccw(c91.598,74.602) 92.025,74.602 U3.4
PWR_LED_K: D4.K R11.2 | length 1.8
  Top Layer w0.25: R11.2 D4.K
SPICLK: U1.6 U2.22 | length 3.9
  Top Layer w0.25: U2.22 77.55,66.725 77.55,67.949 cw(c78.282,67.947) 77.761,68.461 78.27,68.97 ccw(c77.584,69.65) 78.55,69.65 U1.6
SPICSO: U1.1 U2.21 | length 8.4
  Top Layer w0.25: v1(78.025,67.5) 78.05,66.785 cw(c77.8,66.775) 78.05,66.775 U2.21 ; U1.1 79.55,72.725 79.575,72.7 v1(80.5,72.7)
  Bottom Layer w0.25: v1(78.025,67.5) 78.523,67.565 ccw(c78.367,68.733) 79.2,67.9 ccw(c77.496,69.603) 79.906,69.603 79.906,71.264 cw(c81.935,71.265) v1(80.5,72.7)
SPID: U1.5 U2.23 | length 3.9
  Top Layer w0.25: 77,67.785 77,66.65 ccw(c77.25,66.65) 77.021,66.55 77.05,66.55 U2.23 ; 77,67.786 cw(c78.723,67.786) 77.5,69 77.832,69.332 ccw(c77.293,69.863) 78.05,69.863 U1.5
SPIHD: U1.7 U2.19 | length 3.6
  Top Layer w0.25: U2.19 79.05,66.987 79,67.037 79,69.7 79.025,69.725 79.025,70.025 U1.7
SPIQ: U1.2 U2.24 | length 7.9
  Top Layer w0.25: U2.24 76.55,66.725 76.55,70.403 ; 76.55,70.404 cw(c77.995,70.405) 76.97,71.423 cw(c78.128,70.255) 78.128,71.9 78.499,71.9 ccw(c78.498,72.427) 79.025,72.427 79.025,72.725 U1.2
SPIWP: U1.3 U2.20 | length 8.7
  Top Layer w0.25: v1(78.5,68.4) 78.5,68.346 78.55,68.296 U2.20 ; v1(78.5,73.95) 78.525,73.075 U1.3
  Bottom Layer w0.25: v1(78.5,68.4) v1(78.5,73.95)
UART0_RX: D5.6 R4.1 | length 2.2
  Top Layer w0.25: D5.6 70.225,71.925 72.375,71.925 R4.1
UART0_RX_OUT: D5.1 J2.3 | length 3.3
  Top Layer w0.25: J2.3 64.915,72.125 67.625,72.125 D5.1
UART0_TX: D5.4 R8.1 | length 2.2
  Top Layer w0.25: D5.4 70.225,70.025 72.375,70.025 R8.1
UART0_TX_OUT: D5.3 J2.2 | length 3.2
  Top Layer w0.25: J2.2 64.79,69.95 67.7,69.95 D5.3
USB_D_N: D1.1 J1.A7 J1.B7 | length 7.2
  Top Layer w0.175: J1.A7 79.149,83.048 79.107,82.966 ccw(c79.263,82.886) 79.088,82.886 79.088,81.999 ; D1.1 79.188,78.6 cw(c79.188,78.775) 79.013,78.775 79.013,79.2 ccw(c78.639,79.2) 78.887,79.479 ccw(c78.639,79.2) 78.799,79.537 cw(c78.875,79.695) 78.7,79.694 78.7,80.144 78.7,80.174 cw(c79.177,80.174) 78.839,80.511 ccw(c78.238,81.111) 78.852,80.524 ccw(c78.238,81.111) 79.088,81.111 79.088,81.999 ; J1.B7 80.15,82.25 cw(c79.8,82.25) 79.8,81.9 79.187,81.9 cw(c79.187,81.999) 79.088,81.999
USB_D_P: D1.3 J1.A6 J1.B6 | length 8.1
  Top Layer w0.175: D1.3 77.812,78.6 ccw(c77.812,78.775) 77.987,78.775 77.987,79.2 cw(c78.386,79.2) 78.127,79.504 cw(c78.386,79.2) 78.221,79.563 ccw(c78.146,79.722) 78.321,79.721 78.321,80.173 78.321,80.174 cw(c79.177,80.174) 78.572,80.779 ccw(c78.238,81.111) 78.709,81.114 78.709,81.145 78.709,82.388 J1.B6 78.65,83.85 cw(c79,83.85) 79,84.2 79.3,84.2 cw(c79.3,83.85) 79.65,83.85 J1.A6
XTAL_N: C15.2 U2.29 X1.3 | length 10.6
  Top Layer w0.25: X1.3 67.116,64.65 67.116,64.653 cw(c68.7,64.396) 68.7,66 70.4,66 cw(c70.4,63.749) 72.016,65.316 73.164,64.143 ccw(c73.856,64.814) 73.85,63.85 75.675,63.85 U2.29
XTAL_P: C14.2 R7.2 X1.1 | length 3.6
  Top Layer w0.25: X1.1 68.35,62.5 70.225,62.5 70.399,62.5 ccw(c70.4,63.466) 71.08,62.78 71.395,63.095 cw(c71.57,62.917) 71.425,63.12 R7.2
pads on no net: J1.A8 J1.B8 J1.MH J1.SH J2.MH U2.4 U2.5 U4.1 U4.13

## Polygon pours and split planes (outlines as drawn)
GND on Top Layer "GND_L01_P007" (solid, pour order 7): 82.4,83.85 82.738,83.85 cw(c82.738,83.338) 83.1,83.7 83.1,83 ccw(c83.583,83) 83.241,82.659 83.3,82.6 ccw(c83.541,82.841) 83.541,82.5 85.517,82.5 cw(c85.517,81.817) 86,82.3 cw(c85.759,82.059) 86.1,82.059 86.1,77 84.5,77 84.5,79.9 ccw(c83.6,79.9) 84.236,80.536 83.974,80.799 ccw(c83.477,80.302) 83.477,81.005 83.302,81.005 cw(c83.302,81.763) 82.766,81.227 82.627,81.366 cw(c83.175,81.914) 82.4,81.914 82.4,82.175
GND on Top Layer "GND_L01_P006" (solid, pour order 6): 76.5,83.7 76.5,81.041 cw(c76.159,81.041) 76.4,80.8 75.341,80.8 cw(c75.341,81.141) 75.1,80.9 cw(c75.341,81.141) 75,81.141 75,82.25 75.6,82.7 ccw(c75.047,83.071) 75.7,83.2 75.7,83.5 cw(c76.041,83.359) 75.9,83.7
+VBUS_FLT on Top Layer "+VBUS_FLT_L01_P001" (solid, pour order 1): 84.8,75.1 ccw(c84.75,74.65) 84.3,74.7 cw(c83.9,74.7) 83.9,74.3 82.8,74.3 cw(c82.8,74.6) 82.5,74.6 82.5,75.4 82.5,76.3 cw(c82.9,76.3) 82.9,76.7 87.8,76.7 cw(c87.85,76.45) 88.1,76.5 ccw(c88.35,76.55) 88.4,76.3 89.7,76.3 ccw(c89.7,76.7) 90.1,76.7 90.1,77.1 ccw(c89.8,77.1) 89.8,77.4 88.8,77.4 cw(c88.8,77.6) 88.6,77.6 88.6,78.2 cw(c88.8,78.2) 88.8,78.4 90.9,78.4 cw(c90.9,78.1) 91.2,78.1 91.2,75.6 cw(c90.7,75.6) 90.7,75.1
+VBUS on Top Layer "+VBUS_L01_P000" (solid, pour order 0): 81.4,81.3 ccw(c82.036,81.141) 81.877,80.506 cw(c81.686,79.891) 82.3,79.7 82.3,78.4 cw(c79.32,78.371) 82.3,78.369 82.3,77.4 ccw(c82.7,77.4) 82.7,77 83.9,77 ccw(c83.9,77.4) 84.3,77.4 84.3,80.1 ccw(c83.4,80.1) 83.4,81 cw(c83.4,82) 82.4,82 82.4,85.7 ccw(c80.9,85.7) 80.9,87.2 78,87.2 ccw(c78,85.8) 76.6,85.8 76.6,82.4 ccw(c76.9,82.4) 76.9,82.1 77.1,82.1 ccw(c77.1,82.4) 77.4,82.4 77.4,83.7 cw(c78.3,83.7) 78.3,84.6 80.3,84.6 cw(c80.3,83.5) 81.4,83.5
+3V3 on Top Layer "+3V3_L01_P002" (solid, pour order 2): 95.1,78.5 ccw(c94.75,78.55) 94.8,78.9 92,78.9 ccw(c92,78.2) 91.3,78.2 91.3,77.6 ccw(c92,77.6) 92,76.9 94.9,76.9 ccw(c94.85,77.15) 95.1,77.2
GND on Mid Layer 1 "GND_L02_P003" (solid, pour order 3): 64.3,50.3 cw(c64.3,51.3) 63.3,51.3 63.3,89.7 cw(c64.3,89.7) 64.3,90.7 94.1,90.7 cw(c94.1,89.6) 95.2,89.6 95.2,51.3 cw(c94.1,51.3) 94.1,50.2 72.4,50.2 cw(c72.4,50.3) 72.3,50.3
GND on Mid Layer 2 "GND_L03_P005" (solid, pour order 5): 64.3,50.3 cw(c64.3,51.3) 63.3,51.3 63.3,89.7 cw(c64.3,89.7) 64.3,90.7 94.1,90.7 cw(c94.1,89.6) 95.2,89.6 95.2,51.3 cw(c94.1,51.3) 94.1,50.2 72.4,50.2 cw(c72.4,50.3) 72.3,50.3

## Silkscreen, mask and mechanical layers (free items; w line width, h text height)
Top Overlay:
  text "EN" at 71.7,85.9 h0.75 r90
  text "BOOT" at 93.1,84.7 h0.75 r90
  text "+Vin" at 66.8,74 h0.75 r90
  text "Rx" at 66.8,71.8 h0.75 r90
  text "Tx" at 66.8,69 h0.75 r90
  text "Gnd" at 66.9,66.3 h0.75 r90
Mechanical 1:
  lines w0.254: 63,51.27 ccw(c64.27,51.27) 64.27,50 70.23,50 cw(c70.23,48.73) 71.5,48.73 71.5,46.07 ccw(c72.77,46.07) 72.77,44.8 86.43,44.8 ccw(c86.43,46.07) 87.7,46.07 87.7,48.63 cw(c88.97,48.63) 88.97,49.9 94.23,49.9 ccw(c94.23,51.17) 95.5,51.17 95.5,53.67 95.5,89.73 ccw(c94.23,89.73) 94.23,91 73.7,91 64.27,91 ccw(c64.27,89.73) 63,89.73 63,53.77 63,51.27

## Text inside footprints (layer, text, board x,y; h text height)
D2: Mechanical 13 "+" at 83.108,58.883 h0.5 r270
D3: Mechanical 13 "+" at 84.908,58.883 h0.5 r270
D4: Mechanical 13 "+" at 94.483,79.492 h0.5 r180